# EAGLE board july-10 (EAGLE 7.6.0)
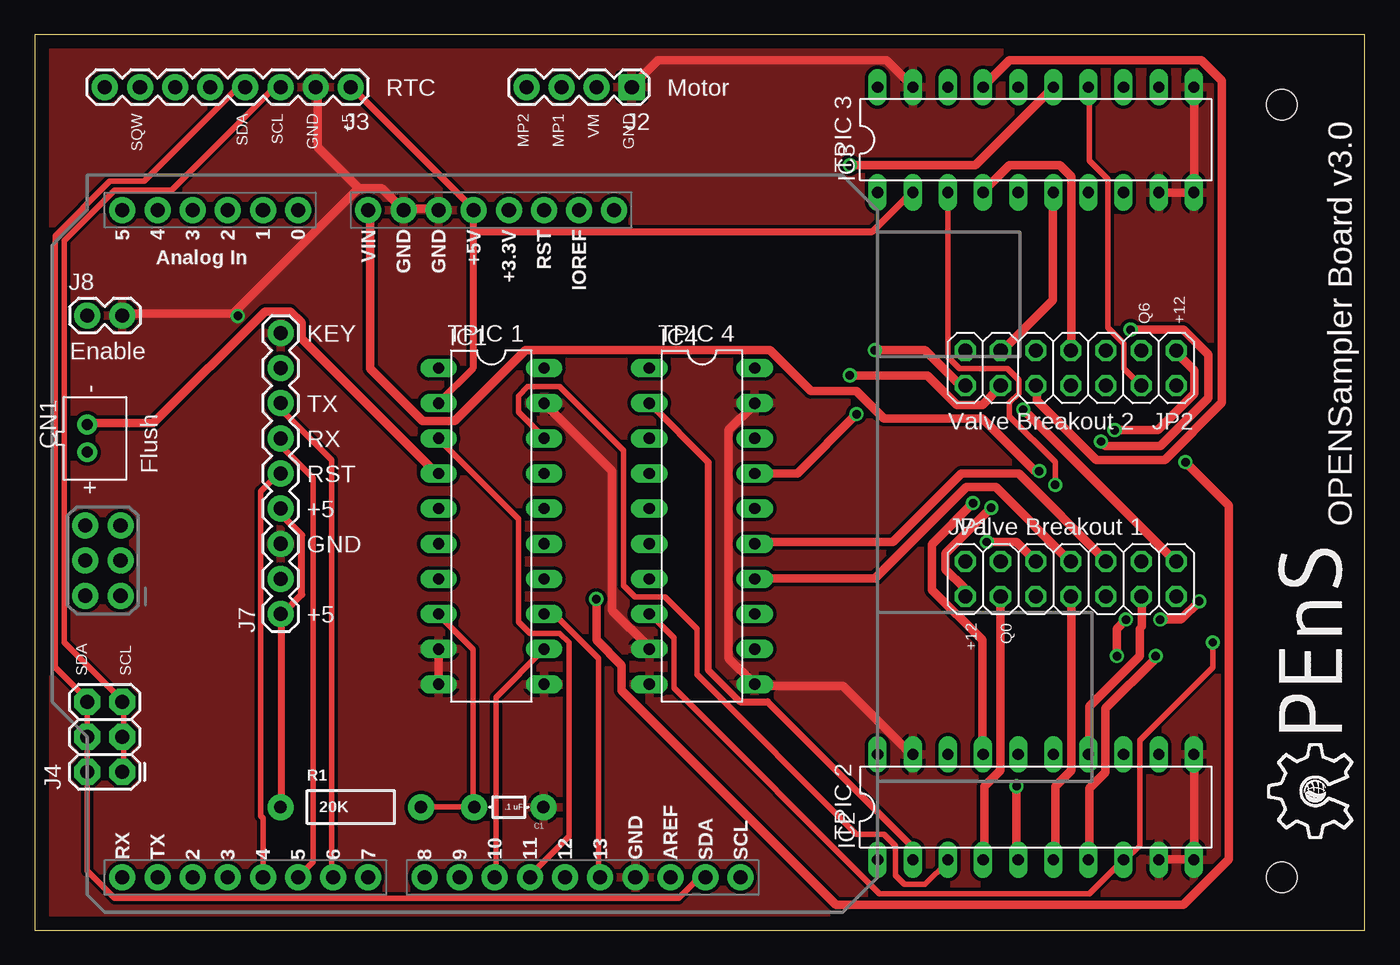
[diagram p0: board, top side]
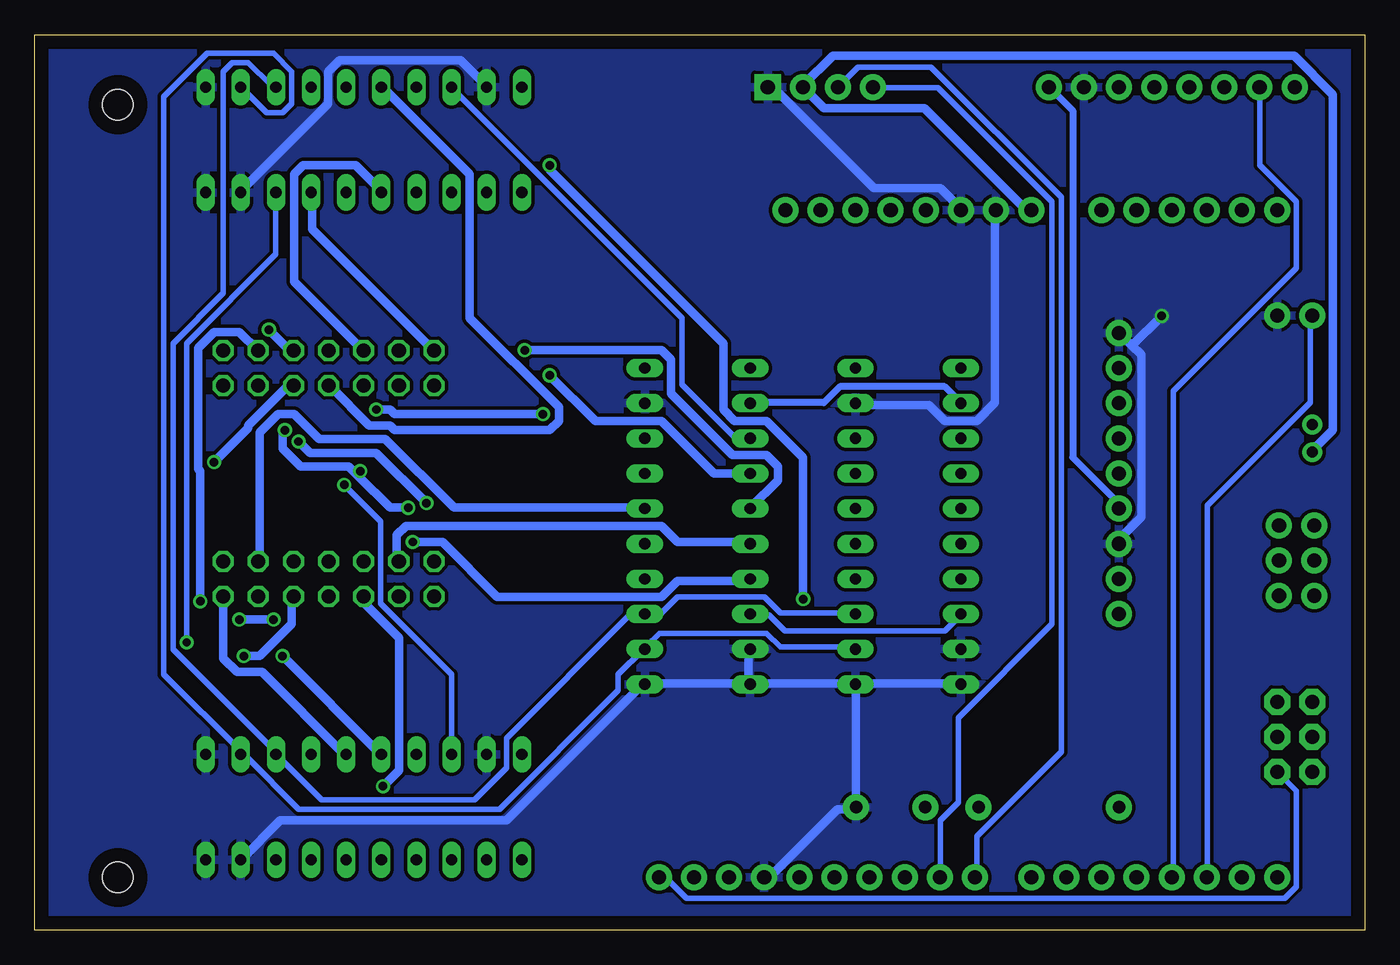
[diagram p1: board, bottom side, seen from below]

Size 96.19 x 64.76 mm. Coordinates in mm from the lower left corner, seen from the top.
Outline: 0,0 96.19,0 96.19,64.76 0,64.76 0,0
Copper layers (1*16): Top 0.035mm / dielectric 1.5mm / Bottom 0.035mm
Design rules "default *": minimum track width 12mil, minimum drill 24mil, track to track 10mil, track to pad 10mil, pad to pad 8mil, via to via 8mil, smd to smd 8mil, copper to edge 40mil, drill to drill 8mil, minimum pad ring 10mil, minimum via ring 8mil, stop-mask expansion 4mil, vias tented up to drill 0mil, thermal gap 10mil
Net classes: 0 default: width 0.406 mm; 1 GND: width 0.61 mm; 2 VCC12: width 0.61 mm; 3 VCC5: width 0.508 mm
Holes 2.2 mm at 90.17,59.69 90.17,3.81

## Footprints (pad centres in the part's own frame; a part is rotated, then mirrored left to right if it is on the bottom)
AXIAL-5MM = drill 0.9 pad 1.88: P$1 -2.5,0; P$2 2.5,0
JST-PH-2-THM = drill 0.8 pad 1.422: 1 1,0; 2 -1,0
DIL20 = drill 0.813 long: 1 -11.43,-3.81; 2 -8.89,-3.81; 3 -6.35,-3.81; 4 -3.81,-3.81; 5 -1.27,-3.81; 6 1.27,-3.81; 7 3.81,-3.81; 8 6.35,-3.81; 9 8.89,-3.81; 10 11.43,-3.81; 11 11.43,3.81; 12 8.89,3.81; 13 6.35,3.81; 14 3.81,3.81; 15 1.27,3.81; 16 -1.27,3.81; 17 -3.81,3.81; 18 -6.35,3.81; 19 -8.89,3.81; 20 -11.43,3.81
1X04 = drill 1.016 pad 1.88 square: 1 0,0 | drill 1.016 pad 1.88: 2 2.54,0; 3 5.08,0; 4 7.62,0
1X08_ROUND = drill 1.016 pad 1.88: 1 0,0; 2 2.54,0; 3 5.08,0; 4 7.62,0; 5 10.16,0; 6 12.7,0; 7 15.24,0; 8 17.78,0
2X3 = drill 1.016 pad 1.88 octagon: 1 0,0; 2 0,2.54; 3 2.54,0; 4 2.54,2.54; 5 5.08,0; 6 5.08,2.54
UNO_R3_SHIELD_ICSP = drill 1.016 pad 1.88: 3.3V 50.8,26.67; 5V 50.8,29.21; 5V_ICSP 22.91,57.29; A0 50.8,41.91; A1 50.8,44.45; A2 50.8,46.99; A3 50.8,49.53; A4 50.8,52.07; A5 50.8,54.61; AREF 2.54,14.986; D2 2.54,49.53; D3 2.54,46.99; D4 2.54,44.45; D5 2.54,41.91; D6 2.54,39.37; D7 2.54,36.83; D8 2.54,32.766; D9 2.54,30.226; D10 2.54,27.686; D11 2.54,25.146; D12 2.54,22.606; D13 2.54,20.066; GND@0 50.8,31.75; GND@1 50.8,34.29; GND@2 2.54,17.526; GND_ICSP 27.99,57.29; IOREF 50.8,21.59; MISO 22.91,54.75; MOSI 25.45,57.29; NC 50.8,19.05; RES 50.8,24.13; RST_ICSP 27.99,54.75; RX 2.54,54.61; SCK 25.45,54.75; SCL 2.54,9.906; SDA 2.54,12.446; TX 2.54,52.07; VIN 50.8,36.83
1X09 = drill 1.016 pad 1.88: 1 0,0; 2 2.54,0; 3 5.08,0; 4 7.62,0; 5 10.16,0; 6 12.7,0; 7 15.24,0; 8 17.78,0; 9 20.32,0
1X02 = drill 1.016 pad 1.88: 1 0,0; 2 2.54,0
2X07 = drill 1.016 octagon: 1 -7.62,-1.27; 2 -7.62,1.27; 3 -5.08,-1.27; 4 -5.08,1.27; 5 -2.54,-1.27; 6 -2.54,1.27; 7 0,-1.27; 8 0,1.27; 9 2.54,-1.27; 10 2.54,1.27; 11 5.08,-1.27; 12 5.08,1.27; 13 7.62,-1.27; 14 7.62,1.27
AXIAL-0.4 = drill 0.9 pad 1.88: P$1 -5.08,0; P$2 5.08,0

## Placement (x,y rotation side)
C1  .1 uF  [AXIAL-5MM]  34.29,8.89 180 top
CN1  [JST-PH-2-THM]  3.81,35.56 270 top
IC1  TPIC6B596N  [DIL20]  33.02,29.21 270 top
IC2  TPIC6B596N  [DIL20]  72.39,8.89 0 top
IC3  TPIC6B596N  [DIL20]  72.39,57.15 0 top
IC4  TPIC6B596N  [DIL20]  48.26,29.21 270 top
J2  [1X04]  43.18,60.96 180 top
J3  [1X08_ROUND]  22.86,60.96 180 top
J4  FEMALE 2x3  [2X3]  6.35,11.43 90 top
J6  ARDUINO_R3_SHIELD_ICSP  [UNO_R3_SHIELD_ICSP]  60.96,1.27 90 top
J7  [1X09]  17.78,22.86 90 top
J8  [1X02]  3.81,44.45 0 top
JP1  [2X07]  74.93,25.4 0 top
JP2  [2X07]  74.93,40.64 180 top
R1  20K  [AXIAL-0.4]  22.86,8.89 0 top
U$1  [OPENS-LOGO]  99.06,6.35 90 top

## Library data of the parts
C1 = SparkFun-Capacitors
CN1 = adafruit
IC1-IC4 = tpic
J2 = SparkFun-Connectors; PROD_ID: CONN-09696
J3 = SparkFun-Connectors; PROD_ID: CONN-08437
J4 = SparkFun-Connectors; PROD_ID: CONN-11566
J6 = SparkFun-Boards
J7 J8 = SparkFun-Connectors
JP1 JP2 = pinhead
R1 = SparkFun-Passives
U$1 = opens-logo

## Nets
DATA0: IC1.3 J6.D11
DATA1: IC1.18 IC2.3
DATA2: IC2.18 IC3.3
DATA3: IC3.18 IC4.3
DATA4: IC4.18
GND [GND]: C1.P$1 IC1.9 IC1.10 IC1.11 IC1.19 IC2.9 IC2.10 IC2.11 IC2.19 IC3.9 IC3.10 IC3.11 IC3.19 IC4.9 IC4.10 IC4.11 IC4.19 J2.1 J3.2 J6.GND@0 J6.GND@1 J6.GND@2 J7.3 J7.9 J8.2
GSM_RESET: J6.D4 J7.5
GSM_RX: J6.D5 J7.6
GSM_TX: J6.D6 J7.7
MP1: J2.3 J6.D8
MP2: J2.4 J6.D9
N$2 [VCC12]: CN1.2 IC1.4
N$5: J6.D2 J8.1
Q0 [VCC12]: IC2.4 JP1.3
Q1 [VCC12]: IC2.5 JP1.5
Q2 [VCC12]: IC2.6 JP1.7
Q3 [VCC12]: IC2.7 JP1.9
Q4 [VCC12]: IC2.14 JP1.11
Q5 [VCC12]: IC2.15 JP1.13
Q6 [VCC12]: IC2.16 JP2.3
Q7 [VCC12]: IC2.17 JP2.5
Q8 [VCC12]: IC3.4 JP2.7
Q9 [VCC12]: IC3.5 JP2.9
Q10 [VCC12]: IC3.6 JP2.11
Q11 [VCC12]: IC3.7 JP2.13
Q12: IC3.14 JP2.4
Q13 [VCC12]: IC3.15 JP2.6
Q14 [VCC12]: IC3.16 JP2.8
Q15 [VCC12]: IC3.17 JP2.10
Q16 [VCC12]: IC4.4 JP2.12
Q17 [VCC12]: IC4.5 JP2.14
Q18 [VCC12]: IC4.6 JP1.4
Q19 [VCC12]: IC4.7 JP1.6
Q20 [VCC12]: IC4.14 JP1.8
Q21 [VCC12]: IC4.15 JP1.10
Q22 [VCC12]: IC4.16 JP1.12
Q23 [VCC12]: IC4.17 JP1.14
RCK: IC1.12 IC2.12 IC3.12 IC4.12 J6.D10
SCK: IC1.13 IC2.13 IC3.13 IC4.13 J6.D13
SCL: J3.3 J4.1 J4.3 J4.5 J6.SCL
SCLR: C1.P$2 IC1.8 IC2.8 IC3.8 IC4.8 R1.P$2
SDA: J3.4 J4.2 J4.4 J4.6 J6.SDA
SQW: J3.7 J6.D3
V5 [VCC5]: IC1.2 IC2.2 IC3.2 IC4.2 J3.1 J6.5V J7.1 J7.4 R1.P$1
V12 [VCC12]: CN1.1 J2.2 J6.VIN JP1.1 JP2.1

## Tracks (layer width: path | path; a pad name or v marks a point on that pad's centre or on a via)
DATA0
  Top 0.406: IC1.3 29.22,35.5 35,29.72 35,22.29 35.83,21.46 37.97,21.46 38.63,20.8 38.63,6.77 35.83,3.96 J6.D11
DATA1
  Top 0.406: IC1.18 36.82,35.66 35,37.48 35,38.63 35.66,39.29 37.97,39.29 42.6,34.67 42.6,24.93 43.42,24.11 45.57,24.11 47.88,21.79 47.88,18.49 59.44,6.93 61.42,6.93 62.24,6.11 62.24,3.96 62.9,3.3 64.39,3.3 66.04,4.95 IC2.3
DATA2  (via drill 0.61)
  Top 0.406: v73.8,32.19 73.8,33.85 70.5,37.15 70.5,38.14 71.16,38.8 71.16,39.79 70.33,40.62 66.86,40.62 66.04,41.44 IC3.3
  Bottom 0.406: IC2.18 66.04,18.49 71.16,23.61 71.16,29.55 v73.8,32.19
DATA3
  Bottom 0.406: IC4.3 44.58,35.66 45.57,35.66 49.37,39.46 49.37,44.25 66.04,60.92 IC3.18
GND  (via drill 0.61)
  Top 0.61: IC2.9 81.39,5.12 83.71,5.12 IC2.10 83.87,5.28 83.87,12.55 IC2.11 | IC1.10 29.22,17.83 29.22,20.31 IC1.9 | IC1.19 36.98,37.97 41.77,33.19 41.77,23.11 44.41,20.47 IC4.9 | IC4.19 52.01,37.97 50.19,36.16 50.19,19.65 52.01,17.83 IC4.11 52.34,17.67 58.45,17.67 63.4,12.71 IC2.19 | IC3.9 81.39,53.33 83.71,53.33 IC3.10 83.87,53.49 83.87,60.92 IC3.11 | IC3.19 63.4,61.09 61.58,62.9 45.07,62.9 43.26,61.09 J2.1 | 14.36,44.58 6.44,44.58 J8.2 | 23.44,53.66 14.36,44.58 | 23.44,53.66 25.09,53.66 26.58,52.17 J6.GND@1 26.91,52.17 29.06,52.17 J6.GND@0 | 23.44,53.66 20.47,56.63 20.47,60.92 J3.2 | v14.69,44.41 14.53,44.41 14.36,44.58
  Bottom 0.61: IC1.11 36.98,17.83 44.41,17.83 IC4.10 | IC4.9 44.58,20.31 44.58,18 IC4.10 | IC4.10 44.74,17.83 52.01,17.83 IC4.11 52.34,17.67 62.08,7.92 78.42,7.92 81.23,5.12 IC2.9 | IC1.10 29.22,17.83 36.65,17.83 IC1.11 | IC1.11 36.82,17.5 36.82,8.91 C1.P$1 36.98,8.75 38.14,8.75 42.93,3.96 43.42,3.96 J6.GND@2 | IC3.9 81.23,53.49 74.95,59.77 74.95,62.08 74.13,62.9 65.38,62.9 63.56,61.09 IC3.19 | 16.84,42.27 17.67,43.09 J7.9 | 16.84,42.27 16.18,41.6 16.18,29.88 17.67,28.4 17.67,28.07 J7.3 | v14.69,44.41 16.84,42.27 | J2.1 43.09,60.92 42.76,60.92 35.5,53.66 30.71,53.66 29.22,52.17 J6.GND@0 | IC1.19 36.82,37.97 31.53,37.97 30.38,36.82 28.07,36.82 26.75,38.14 26.75,52.01 J6.GND@1
  pour Top: 0,0 0,64.77 96.52,64.77 96.52,0
  pour Bottom: 0,0 0,64.77 96.52,64.77 96.52,0
GSM_RESET
  Top 0.406: J6.D4 16.51,8.09 16.34,8.26 16.34,31.7 17.67,33.02 J7.5
GSM_RX
  Top 0.406: J7.6 17.83,35.5 17.83,35 20.14,32.69 20.14,4.95 19.15,3.96 J6.D5
GSM_TX
  Top 0.406: J7.7 17.83,37.97 17.83,37.64 21.46,34.01 21.46,3.96 J6.D6
MP1
  Bottom 0.406: J2.3 36.65,62.41 31.37,62.41 21.96,53 21.96,12.88 28.07,6.77 28.07,3.96 J6.D8
MP2
  Bottom 0.406: J6.D9 30.71,3.96 30.71,7.92 29.39,9.25 29.39,15.35 22.62,22.12 22.62,52.67 30.87,60.92 35.5,60.92 J2.4
N$2
  Top 0.61: IC1.4 29.06,33.02 19.32,42.76 19.32,43.92 18.49,44.74 16.68,44.74 8.59,36.65 3.96,36.65 CN1.2
N$5
  Bottom 0.406: J8.1 3.96,44.41 3.96,38.14 11.39,30.71 11.39,3.96 J6.D2
Q0
  Top 0.61: IC2.4 68.68,5.12 68.68,10.4 69.84,11.56 69.84,24.11 JP1.3
Q1  (via drill 0.61)
  Top 0.61: v70.99,10.4 70.99,5.12 IC2.5
  Bottom 0.61: v70.99,10.4 69.84,11.56 69.84,21.13 72.31,23.61 72.31,24.11 JP1.5
Q2
  Top 0.61: IC2.6 73.8,5.12 73.8,10.4 74.95,11.56 74.95,24.11 JP1.7
Q3  (via drill 0.61)
  Top 0.61: v81.06,19.81 81.06,19.65 77.43,16.02 77.43,11.39 76.28,10.24 76.28,5.12 IC2.7
  Bottom 0.61: v81.06,19.81 79.91,19.81 77.6,22.12 77.6,24.11 JP1.9
Q4
  Top 0.61: IC2.14 76.28,12.71 76.28,16.18 79.91,19.81 79.91,21.79 80.07,21.96 80.07,24.11 JP1.11
Q5
  Bottom 0.61: JP1.13 82.55,19.65 81.56,18.66 79.74,18.66 73.8,12.71 IC2.15
Q6  (via drill 0.61)
  Top 0.61: v78.26,19.81 78.26,21.79 v78.92,22.45 | v81.39,22.45 82.88,22.45 v84.2,23.77
  Bottom 0.61: v78.26,19.81 71.16,12.71 IC2.16 | v81.39,22.45 v78.92,22.45 | v84.2,23.77 84.2,33.19 84.37,33.35 84.37,42.1 83.21,43.26 81.39,43.26 80.07,41.94 JP2.3
Q7  (via drill 0.61)
  Top 0.61: v67.86,30.87 64.88,27.9 64.88,24.6 68.52,20.97 68.52,12.71 IC2.17 | v77.1,35.33 77.43,35 81.39,35 84.86,38.47 84.86,41.6 83.05,43.42 v79.25,43.42
  Bottom 0.61: v67.86,30.87 71.49,34.51 76.28,34.51 v77.1,35.33 | v79.25,43.42 77.6,41.77 JP2.5
Q8
  Top 0.61: IC3.4 68.68,53.49 70.5,55.31 74.13,55.31 74.95,54.48 74.95,41.94 JP2.7
Q9
  Bottom 0.61: IC3.5 71.16,53.49 72.97,55.31 76.77,55.31 77.43,54.65 77.43,46.89 72.48,41.94 JP2.9
Q10
  Top 0.61: IC3.6 73.64,53.33 73.64,45.57 70,41.94 JP2.11
Q11
  Bottom 0.61: IC3.7 76.11,53.33 76.11,50.69 67.36,41.94 JP2.13
Q12
  Top 0.406: IC3.14 76.28,60.92 76.28,55.64 77.6,54.32 77.6,43.59 78.75,42.43 78.75,40.62 79.91,39.46 JP2.4
Q13  (via drill 0.61)
  Top 0.61: v58.94,55.31 68.02,55.31 73.64,60.92 IC3.15 | v40.62,23.94 40.62,20.97 42.43,19.15 42.43,17.34 57.95,1.82 83.05,1.82 86.35,5.12 86.35,30.71 v83.21,33.85
  Bottom 0.61: v58.94,55.31 58.94,54.98 46.39,42.43 46.39,37.64 45.57,36.82 43.26,36.82 40.62,34.18 v40.62,23.94 | v83.21,33.85 80.73,36.32 80.73,36.49 77.93,39.29 77.6,39.29 JP2.6
Q14
  Bottom 0.61: IC3.16 70.99,60.92 64.72,54.65 64.72,44.25 58.28,37.81 58.28,36.82 58.94,36.16 70.17,36.16 70.5,36.49 71.98,36.49 74.79,39.29 JP2.8
Q15
  Top 0.61: IC3.17 68.68,61.09 70.5,62.9 84.37,62.9 85.85,61.42 85.85,38.14 81.72,34.01 76.77,34.01 72.48,38.3 72.48,39.29 JP2.10
Q16  (via drill 0.61)
  Top 0.61: v58.94,40.12 64.55,40.12 66.7,37.97 68.52,37.97 69.84,39.29 JP2.12
  Bottom 0.61: IC4.4 47.05,33.02 50.85,36.82 55.64,36.82 v58.94,40.12
Q17  (via drill 0.61)
  Top 0.61: v60.76,41.94 64.39,41.94 66.86,39.46 67.2,39.46 JP2.14
  Bottom 0.61: v60.76,41.94 50.85,41.94 50.19,41.27 50.19,38.8 45.73,34.34 43.26,34.34 42.43,33.52 42.43,32.52 44.41,30.54 IC4.5
Q18
  Bottom 0.61: IC4.6 44.58,28.07 49.7,28.07 50.85,29.22 69.34,29.22 70,28.56 70,26.75 JP1.4
Q19  (via drill 0.61)
  Top 0.61: v68.85,28.07 70.99,28.07 JP1.6
  Bottom 0.61: v68.85,28.07 66.7,28.07 62.74,24.11 50.85,24.11 49.7,25.26 44.58,25.26 IC4.7
Q20
  Top 0.61: IC4.14 52.17,25.43 60.76,25.43 67.36,32.03 69.51,32.03 74.79,26.75 JP1.8
Q21
  Top 0.61: IC4.15 52.17,28.07 62.08,28.07 67.03,33.02 71.16,33.02 77.43,26.75 JP1.10
Q22
  Bottom 0.61: IC4.16 52.17,30.54 65.88,30.54 70.83,35.5 75.62,35.5 77.43,37.31 78.59,37.31 79.91,35.99 79.91,26.75 JP1.12
Q23  (via drill 0.61)
  Top 0.61: IC4.17 55.14,33.02 v59.44,37.31 | v71.49,37.64 82.55,26.58 JP1.14
  Bottom 0.61: v59.44,37.31 70.17,37.31 70.5,37.64 v71.49,37.64
RCK
  Top 0.406: IC1.12 33.35,16.84 33.35,3.96 J6.D10
  Bottom 0.406: IC1.12 36.98,20.47 42.27,20.47 43.26,21.46 51.02,21.46 52.01,20.47 IC4.12 52.17,20.31 53.99,18.49 53.99,17.34 62.57,8.75 77.1,8.75 80.9,12.55 81.23,12.55 IC2.12 81.23,12.88 86.84,18.49 86.84,60.26 83.71,63.4 78.92,63.4 77.6,62.08 77.6,59.77 78.26,59.11 79.41,59.11 81.23,60.92 IC3.12
SCK
  Top 0.406: J6.D13 40.78,3.96 40.78,19.65 37.64,22.78 36.98,22.78 IC1.13
  Bottom 0.406: IC1.13 36.98,22.95 42.27,22.95 43.42,24.11 49.7,24.11 50.85,22.95 52.01,22.95 IC4.13 52.17,22.78 53.16,22.78 62.08,13.87 62.08,11.72 64.39,9.41 75.45,9.41 IC2.13 78.75,12.88 86.18,20.31 86.18,42.43 82.55,46.06 82.55,62.08 81.89,62.74 80.73,62.74 79.08,61.09 78.75,61.09 IC3.13
SCL
  Top 0.406: J4.1 6.44,11.56 6.44,13.87 J4.3 6.44,14.03 6.44,16.51 J4.5 6.27,16.68 2.15,20.8 2.15,49.86 5.78,53.49 9.91,53.49 17.34,60.92 17.67,60.92 J3.3
  Bottom 0.406: J6.SCL 51.02,3.8 50.52,3.8 49.03,2.31 5.78,2.31 4.95,3.14 4.95,10.07 6.27,11.39 J4.1
SCLR  (via drill 0.61)
  Top 0.406: IC1.8 29.22,22.78 31.7,20.31 31.7,8.91 C1.P$2 31.53,8.91 28.07,8.91 R1.P$2 | IC4.8 44.58,22.78 46.23,21.13 46.23,17.5 61.09,2.64 76.28,2.64 78.59,4.95 IC2.8 78.92,5.12 79.91,6.11 79.91,13.7 85.19,18.99 v85.19,20.8
  Bottom 0.406: IC4.8 44.41,22.78 43.09,22.78 41.94,21.63 30.38,21.63 29.22,22.78 IC1.8 | v85.19,20.8 85.19,42.43 78.75,48.87 78.75,53.33 IC3.8
SDA
  Top 0.406: J6.SDA 48.37,3.8 48.04,3.8 46.56,2.31 5.78,2.31 3.8,4.29 3.8,11.23 J4.2 3.8,11.56 3.8,13.87 J4.4 3.8,14.03 3.8,16.51 J4.6 3.8,16.68 1.49,18.99 1.49,50.19 5.45,54.15 7.92,54.15 14.69,60.92 15.19,60.92 J3.4
SQW
  Bottom 0.406: J3.7 7.59,60.92 7.59,55.31 4.95,52.67 4.95,47.88 13.87,38.96 13.87,3.96 J6.D3
V5
  Top 0.508: R1.P$1 17.83,8.91 17.83,22.78 J7.1 18,22.95 19.32,24.27 19.32,28.56 17.83,30.05 17.83,30.38 J7.4 | 31.7,50.52 31.7,52.01 J6.5V 31.7,52.17 22.95,60.92 J3.1 | 31.7,50.52 31.7,40.62 29.22,38.14 IC1.2 | IC4.2 48.7,33.85 48.7,18.82 51.02,16.51 53,16.51 63.4,6.11 63.4,5.12 IC2.2 | 31.7,50.52 60.59,50.52 63.4,53.33 IC3.2
  Bottom 0.508: IC4.2 44.41,38.14 39.13,38.14 37.97,39.29 30.38,39.29 29.22,38.14 IC1.2 | J7.4 17.83,30.54 17.83,30.87 21.13,34.18 21.13,59.27 22.78,60.92 J3.1
V12  (via drill 0.61)
  Top 0.61: v69.18,30.54 65.88,27.24 65.88,26.09 67.2,24.77 67.2,24.27 JP1.1 | v78.09,36.16 81.23,36.16 83.87,38.8 83.87,40.45 82.55,41.77 JP2.1 | v72.64,33.19 72.31,33.19 68.52,36.98 61.42,36.98 59.44,38.96 56.13,38.96 53.16,41.94 35.5,41.94 30.38,36.82 28.07,36.82 24.27,40.62 24.27,52.01 J6.VIN
  Bottom 0.61: v69.18,30.54 70.5,30.54 72.81,32.85 | 72.81,32.85 73.47,33.52 76.94,33.52 78.26,34.84 78.26,35.99 v78.09,36.16 | CN1.1 3.8,34.67 2.31,36.16 2.31,60.43 5.12,63.23 38.47,63.23 40.62,61.09 J2.2 40.45,60.76 39.13,59.44 31.86,59.44 24.6,52.17 24.27,52.17 J6.VIN | v72.64,33.19 72.64,33.02 72.81,32.85

## Text on the board
tPlace: RTC | Motor | TPIC 3 | SQW | SDA | SCL | GND | +5 | MP2 | MP1 | VM | GND | Q6 | +12 | KEY | TPIC 1 | TPIC 4 | Enable | TX | Valve Breakout 2 | RX | Flush | RST | +5 | Valve Breakout 1 | OPENSampler Board v3.0 | GND | +5 | +12 | Q0 | SDA | SCL | TPIC 2